# Altium PCB Main.PcbDoc
Units mm, origin at the board's own origin, x right, y up, seen from the top; angles counter-clockwise.
Board outline 98.81 x 90.42 mm, 4 copper layers (Top Layer, GND, PWR, Bottom Layer), stack 0.603 mm thick; 84 components, 51 nets, 262 pads, 1 vias.
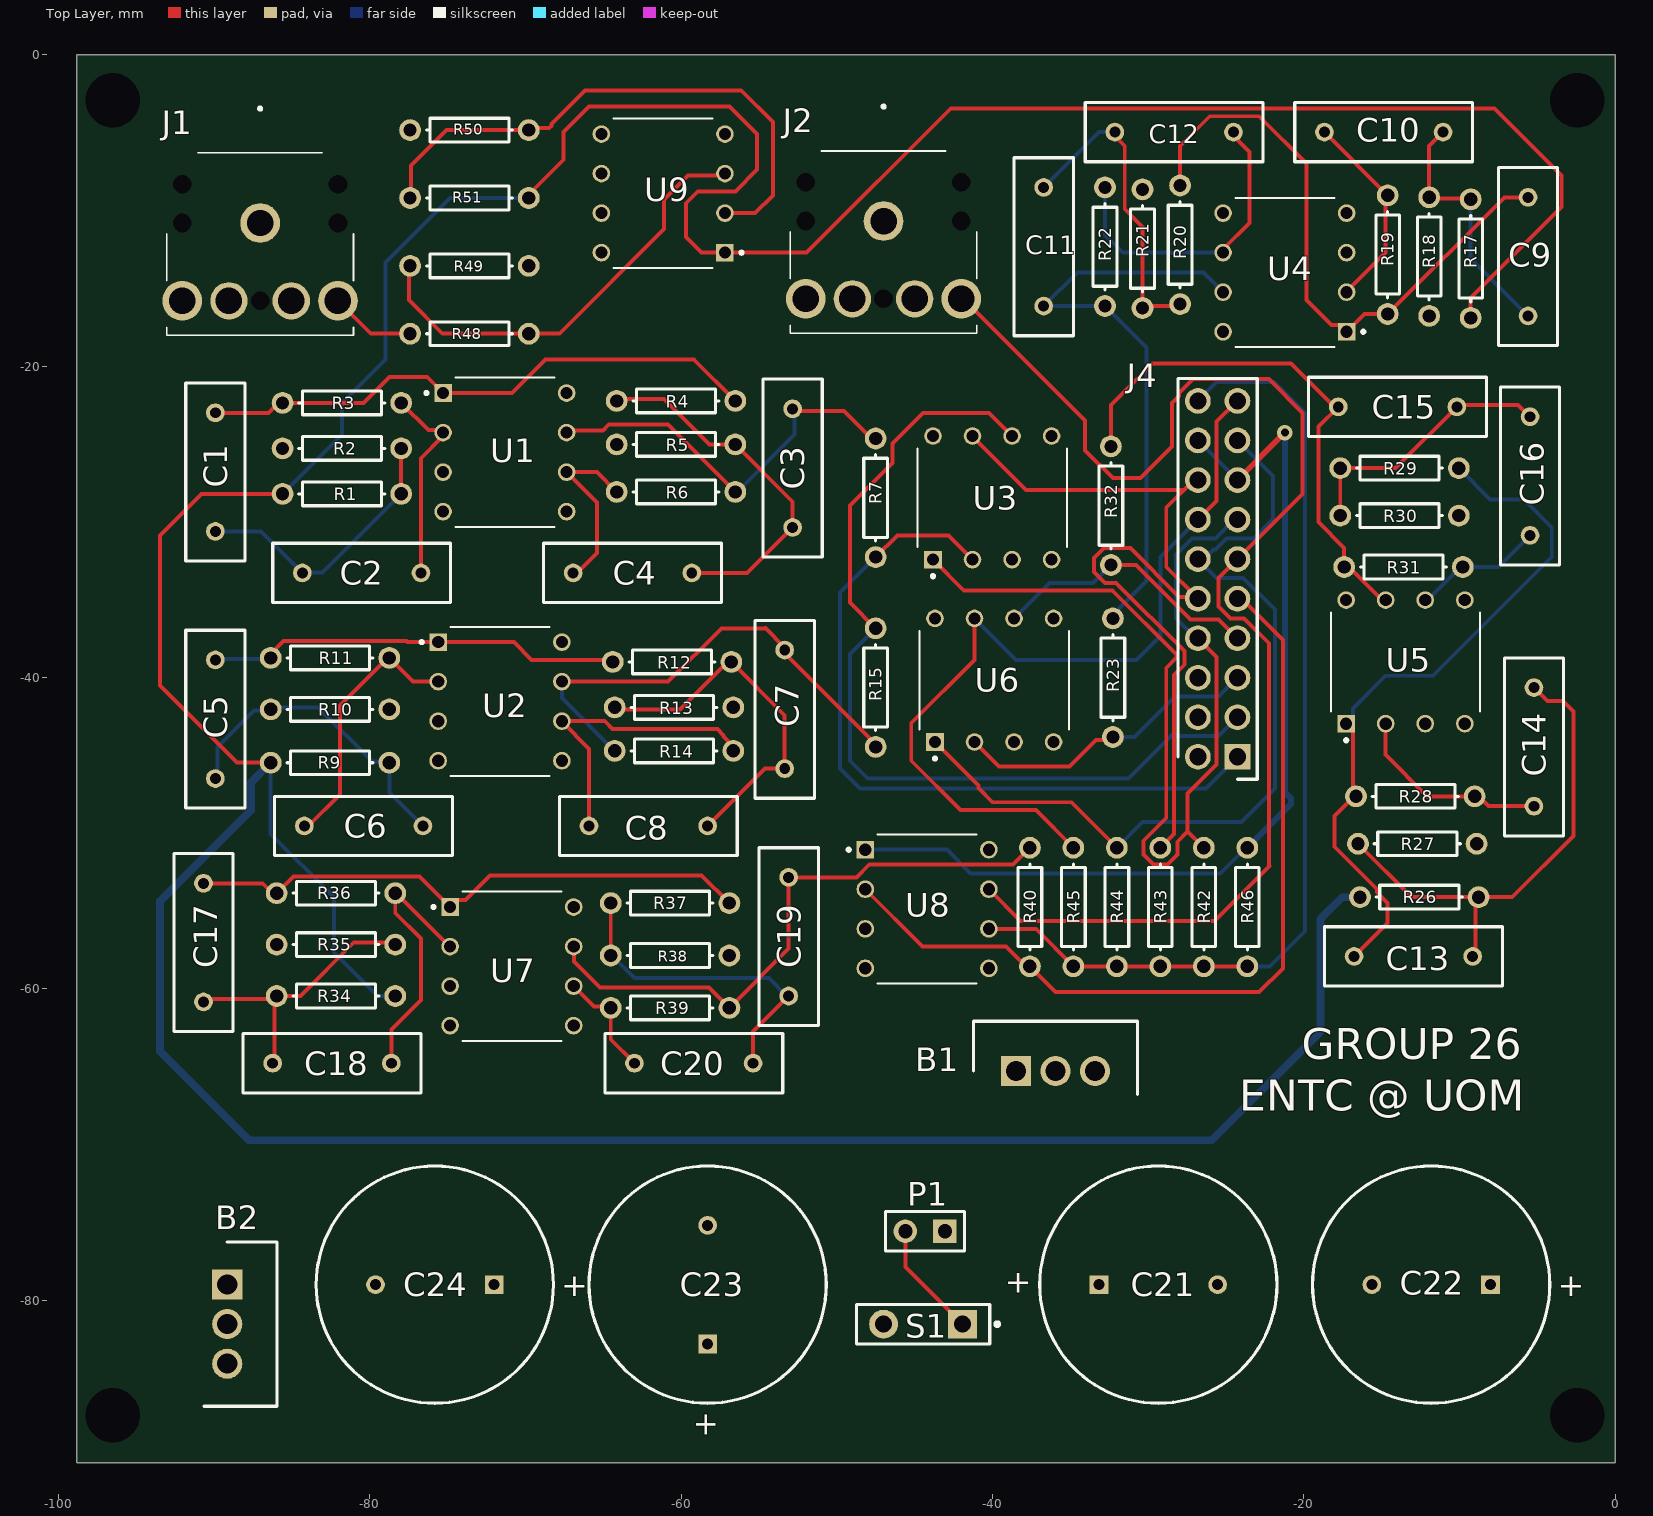
[diagram p0: Top Layer view]
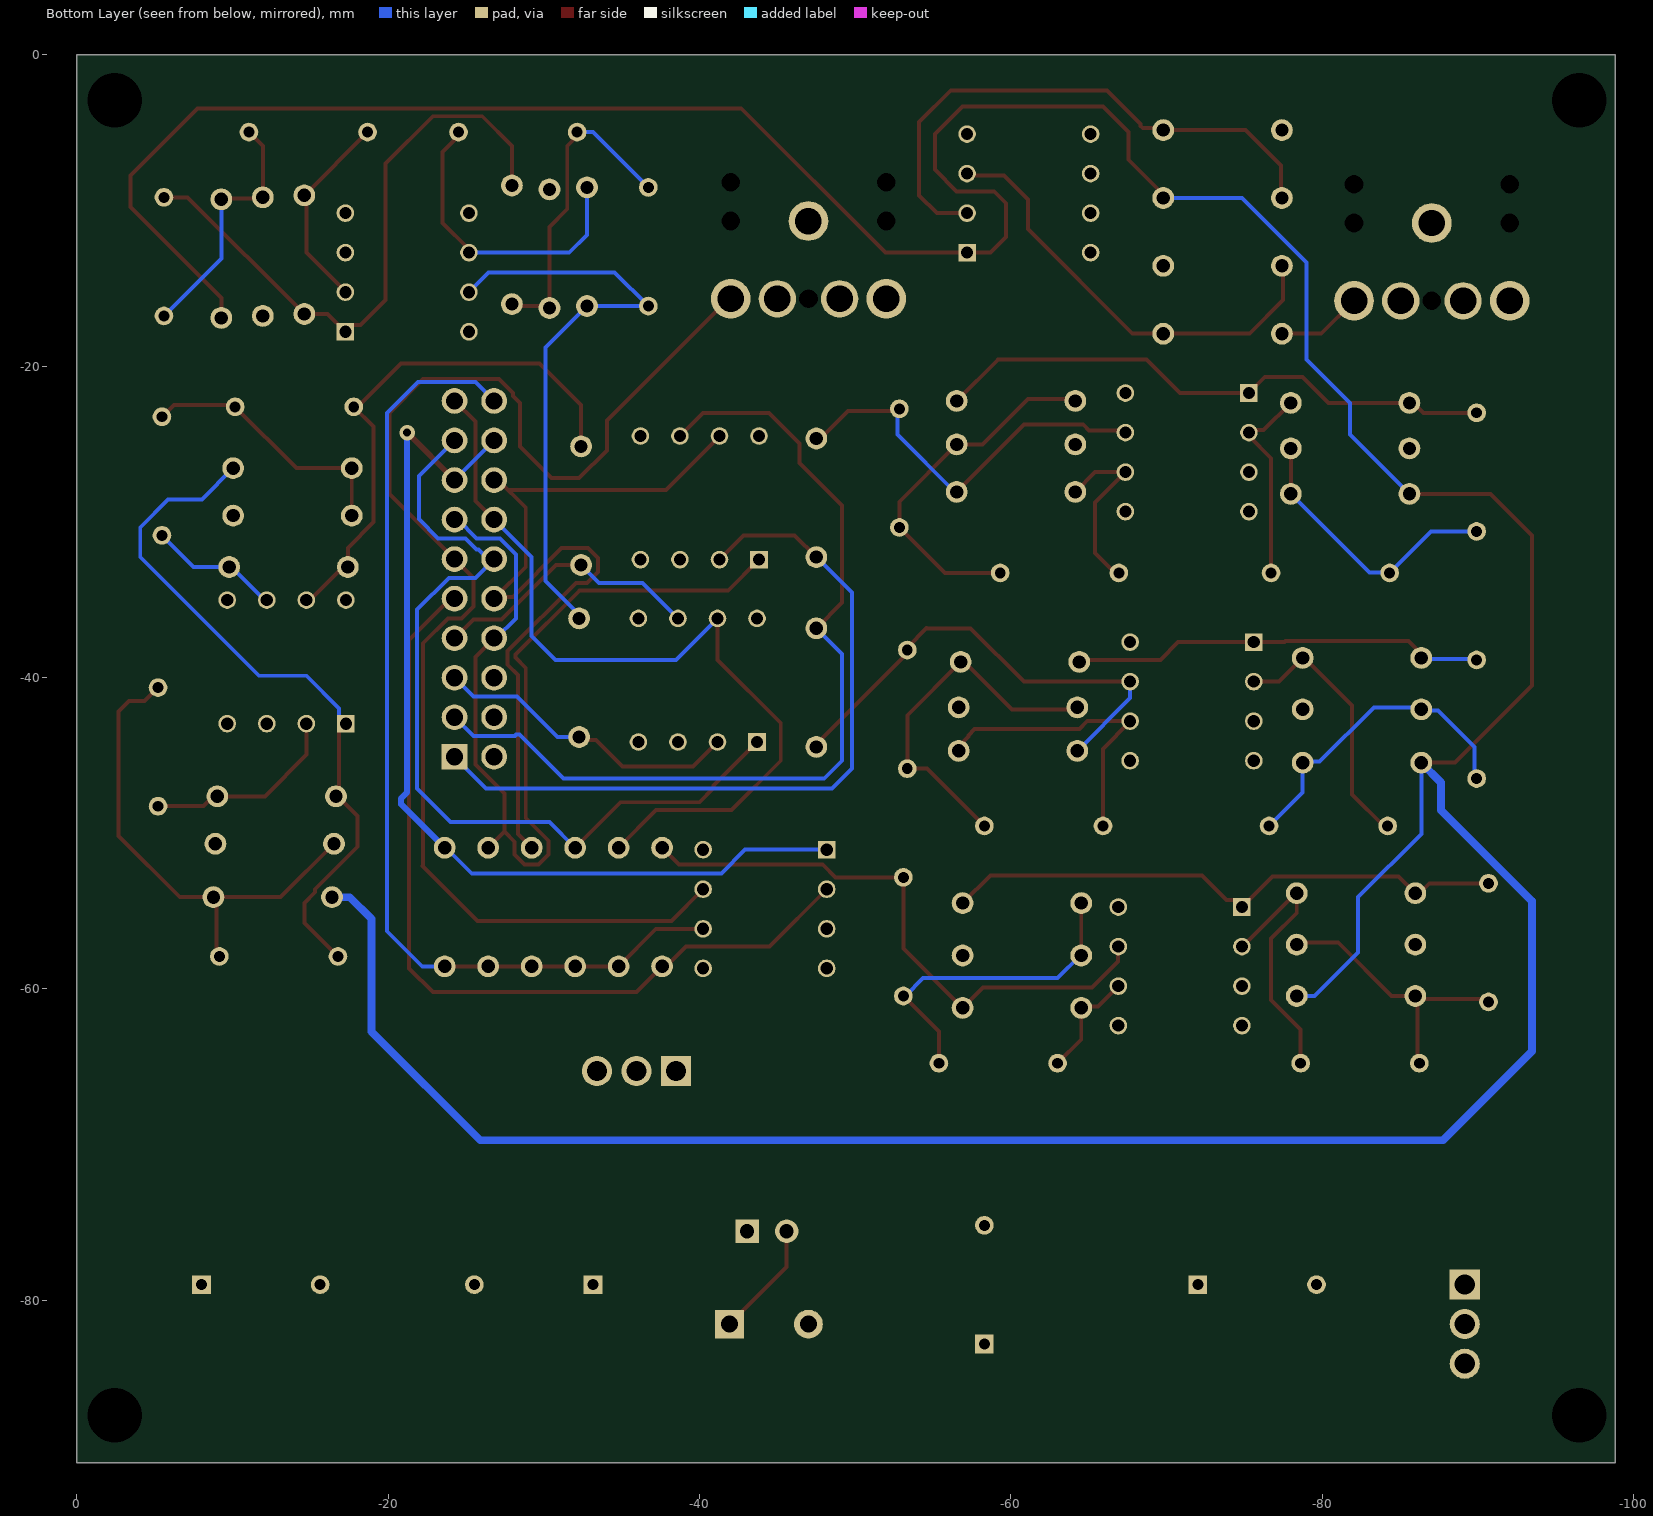
[diagram p1: Bottom Layer view, seen from below]
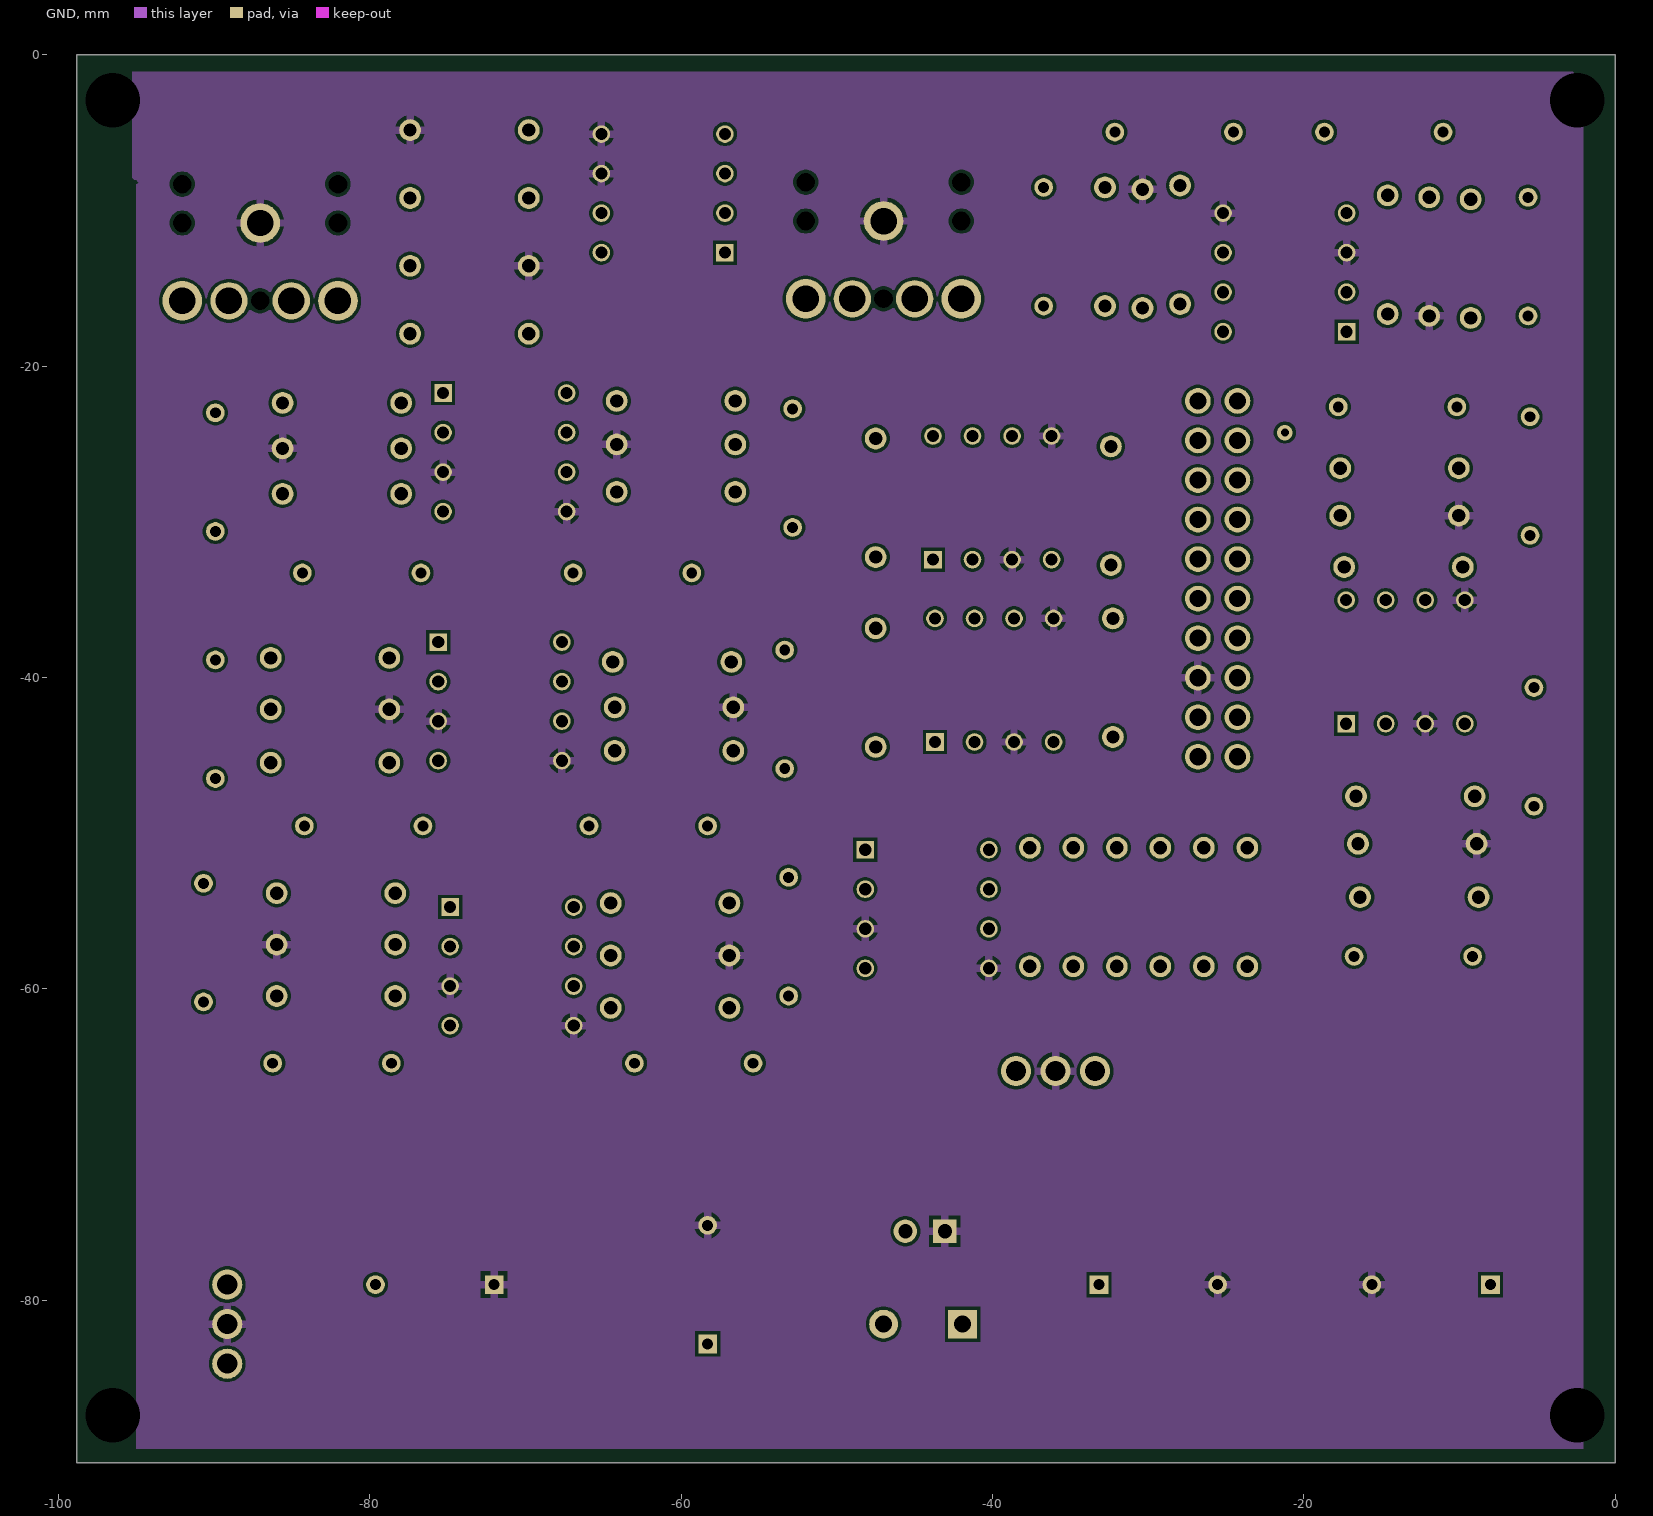
[diagram p2: GND]
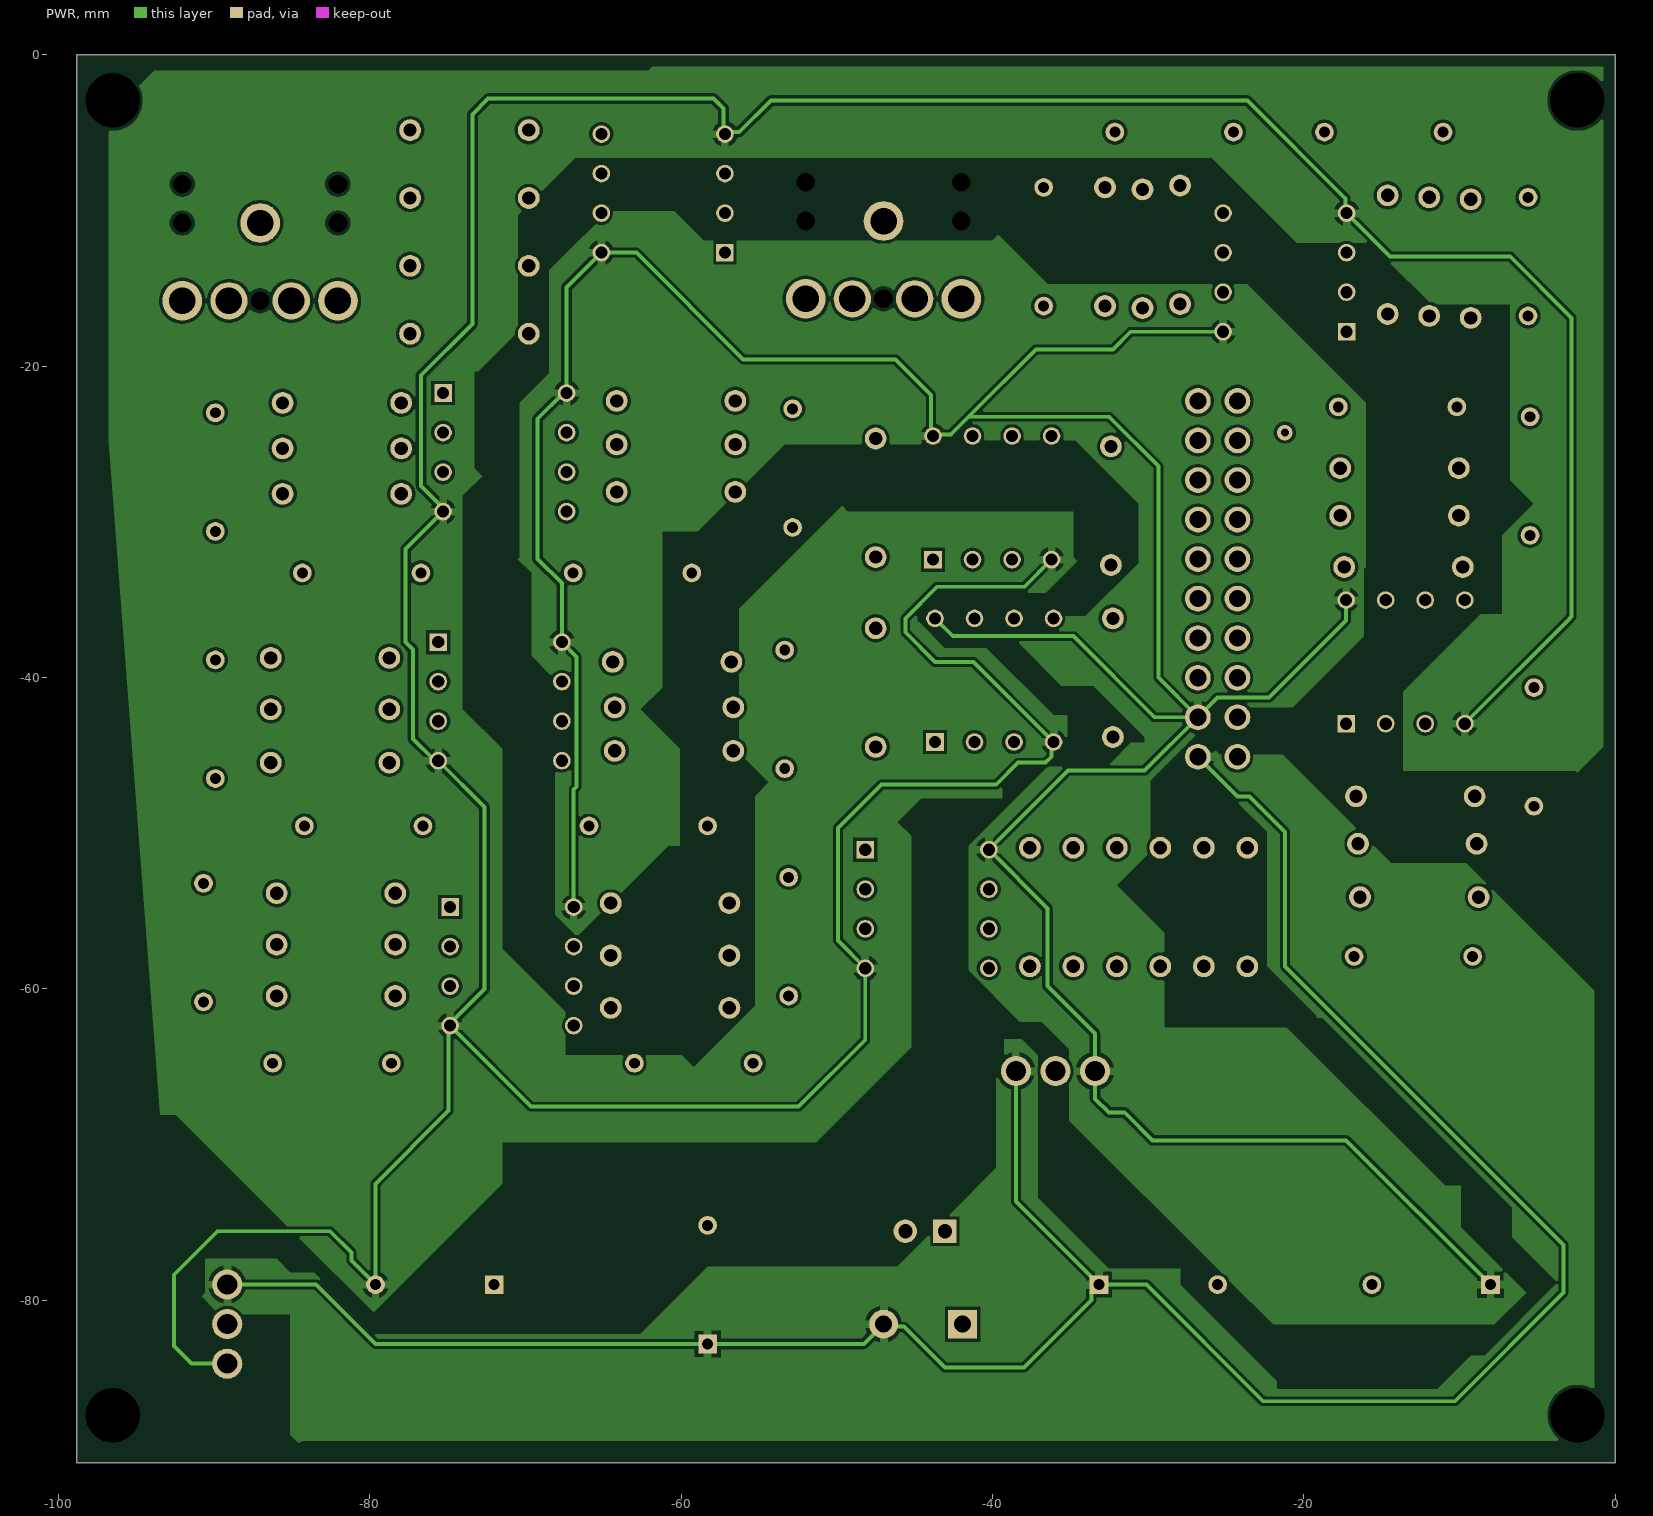
[diagram p3: PWR]

## Layer stack, top to bottom
Top Solder: solder mask 0.0102, Solder Resist, Dk 3.5
Top Layer: signal copper 0.0356
Dielectric 2: prepreg 0.0711, PP-006, Dk 4.1
GND: signal copper 0.035
Dielectric 1: dielectric 0.32, FR-4, Dk 4.8
PWR: signal copper 0.035
Dielectric 3: prepreg 0.0711, PP-006, Dk 4.1
Bottom Layer: signal copper 0.0356
Bottom Solder: solder mask 0.0102, Solder Resist, Dk 3.5

## Board outline
-98.806,-90.424 0,-90.424 0,0 -98.806,0

## Design rules (kind name [scope] priority, off if disabled: settings)
BoardOutlineClearance [All] p1: gap=0.2 ignorepadtopadclearanceinfootprint=FALSE except(0.4: Arc-SplitBarrior Arc-SplitContinuation Track-SplitBarrior Track-SplitContinuation SMDPad-SplitBarrior SMDPad-SplitContinuation THPad-SplitBarrior THPad-SplitContinuation Via-SplitBarrior Via-SplitContinuation Fill-SplitBarrior Fill-SplitContinuation Poly-SplitBarrior Poly-SplitContinuation Region-SplitBarrior Region-SplitContinuation Text-SplitBarrior Text-SplitContinuation)
Clearance "Clearance Bottom Layer" [OnLayer('Bottom Layer')] p1: gap=0.203 ignorepadtopadclearanceinfootprint=TRUE except(0.254: Arc-Text Track-Text SMDPad-Text THPad-Text Via-Text Fill-Text Poly-Text Region-Text Text-Text)
Clearance "Clearance Top Layer" [OnLayer('Top Layer')] p2: gap=0.203 ignorepadtopadclearanceinfootprint=TRUE except(0.254: Arc-Text Track-Text SMDPad-Text THPad-Text Via-Text Fill-Text Poly-Text Region-Text Text-Text)
Clearance [All] p3: gap=0.2 ignorepadtopadclearanceinfootprint=FALSE except(0.089: Arc-Arc Arc-Track Arc-SMDPad Track-Track Track-SMDPad SMDPad-SMDPad; 0.127: Arc-Via Track-Via SMDPad-Via THPad-Via Via-Via; 0.254: Arc-Text Track-Text SMDPad-Text THPad-Text Via-Text Fill-Text Poly-Text Region-Text Text-Text)
HoleSize [All] p1: absolutevalues=TRUE maxlimit=6.3 minlimit=0.2 maxpercent=80.000 minpercent=20.000
MinimumAnnularRing [All] p1: minimumring=0.076
MinimumSolderMaskSliver [All] p1: minsoldermaskwidth=0.1
PolygonConnect PolygonConnect_1 [All] p1: thpad.connectstyle=Relief thpad.reliefconductorwidth=0.508 thpad.reliefentries=4 thpad.polygonreliefangle="90 Angle" thpad.airgapwidth=0.254 smdpad.connectstyle=Relief smdpad.reliefconductorwidth=0.508 smdpad.reliefentries=4 smdpad.polygonreliefangle="90 Angle" smdpad.airgapwidth=0.254 via.connectstyle=Direct via.reliefconductorwidth=0.508 via.reliefentries=4 via.polygonreliefangle="90 Angle" via.airgapwidth=0.254
RoutingCorners [All] p1: cornerstyle=Round minsetback=2.54 maxsetback=2.54
RoutingVias [All] p1: holewidth=0.5 width=1 viastyle="Through Hole" minholewidth=0.2 minwidth=0.45 maxholewidth=1 maxwidth=2
SilkToSilkClearance [All] p1: silktosilkclearance=0.1
SilkToSolderMaskClearance [IsPad] p1: minsilkscreentomaskgap=0.1 clearancetoexposedcopper=TRUE
SolderMaskExpansion [All] p1: expansion=0.102 istentingtop=FALSE
Width [All] p1: maxlimit=2.54 minlimit=0.089 preferedwidth=0.381
25 further rules are at their usual default settings.

## Components (designator, comment, footprint, x,y, rotation, side; value= is the part's Value field where it differs from the comment)
B1 "LM7812CT" TO254P470X1028X1955-3P -38.481,-65.278 r0 top
B2 "LM7912CT_NOPB" TO254P470X1028X1955-3P -89.154,-78.994 r270 top
C1 "Cap" RAD-0.3 -89.916,-26.797 r90 top value=100nF
C2 "Cap" RAD-0.3 -80.518,-33.274 r0 top value=100nF
C3 "Cap" RAD-0.3 -52.832,-26.543 r90 top value=100nF
C4 "Cap" RAD-0.3 -63.119,-33.274 r180 top value=100nF
C5 "Cap" RAD-0.3 -89.916,-42.672 r90 top value=100nF
C6 "Cap" RAD-0.3 -80.391,-49.53 r180 top value=100nF
C7 "Cap" RAD-0.3 -53.34,-42.037 r90 top value=100nF
C8 "Cap" RAD-0.3 -62.103,-49.53 r180 top value=100nF
C9 "Cap" RAD-0.3 -5.588,-12.954 r90 top value=10nF
C10 "Cap" RAD-0.3 -14.859,-4.953 r180 top value=10nF
C11 "Cap" RAD-0.3 -36.703,-12.319 r270 top value=10nF
C12 "Cap" RAD-0.3 -28.321,-4.953 r0 top value=10nF
C13 "Cap" RAD-0.3 -12.954,-57.912 r180 top value=10nF
C14 "Cap" RAD-0.3 -5.207,-44.45 r270 top value=10nF
C15 "Cap" RAD-0.3 -13.97,-22.606 r180 top value=10nF
C16 "Cap" RAD-0.3 -5.461,-27.051 r270 top value=10nF
C17 "Cap" RAD-0.3 -90.678,-57.023 r90 top value=1nF
C18 "Cap" RAD-0.3 -82.423,-64.77 r0 top value=1nF
C19 "Cap" RAD-0.3 -53.086,-56.642 r90 top value=1nF
C20 "Cap" RAD-0.3 -59.182,-64.77 r180 top value=1nF
C21 "Cap Pol1" RB7.6-15 -29.337,-78.994 r180 top value=0.330pF
C22 "Cap Pol1" RB7.6-15 -11.811,-78.994 r0 top value=0.100pF
C23 "Cap Pol1" RB7.6-15 -58.293,-78.994 r270 top value=0.220pF
C24 "Cap Pol1" RB7.6-15 -75.819,-78.994 r0 top value=0.100pF
J1 "SJ1-3523N" SJ13523N -87.042,-6.295 r270 top
J2 "SJ1-3523N" SJ13523N -46.99,-6.168 r270 top
J4 "M20-9761042" HDRV20W64P254_2X10_2540X508X838P -24.257,-45.085 r90 top
P1 "Header 2" HDR1X2 -43.053,-75.565 r180 top
R1 "Res1" AXIAL-0.3 -81.788,-28.194 r0 top value=12K
R2 "Res1" AXIAL-0.3 -81.788,-25.273 r0 top value=68K
R3 "Res1" AXIAL-0.3 -81.788,-22.352 r180 top value=39K
R4 "Res1" AXIAL-0.3 -60.325,-22.225 r180 top value=3.3K
R5 "Res1" AXIAL-0.3 -60.325,-25.019 r0 top value=22K
R6 "Res1" AXIAL-0.3 -60.325,-28.067 r0 top value=10K
R7 "Res1" AXIAL-0.3 -47.498,-28.448 r90 top value=2.2K
R9 "Res1" AXIAL-0.3 -82.55,-45.466 r180 top value=3.3K
R10 "Res1" AXIAL-0.3 -82.55,-42.037 r180 top value=2K
R11 "Res1" AXIAL-0.3 -82.55,-38.735 r180 top value=10K
R12 "Res1" AXIAL-0.3 -60.579,-38.989 r180 top value=1.5K
R13 "Res1" AXIAL-0.3 -60.452,-41.91 r180 top value=910
R14 "Res1" AXIAL-0.3 -60.452,-44.704 r180 top value=4.7K
R15 "Res1" AXIAL-0.3 -47.498,-40.64 r90 top value=2.2K
R17 "Res1" AXIAL-0.3 -9.271,-13.081 r90 top value=9.1K
R18 "Res1" AXIAL-0.3 -11.938,-12.954 r90 top value=7.5K
R19 "Res1" AXIAL-0.3 -14.605,-12.827 r270 top value=27K
R20 "Res1" AXIAL-0.3 -27.94,-12.192 r270 top value=3.6K
R21 "Res1" AXIAL-0.3 -30.353,-12.446 r270 top value=3K
R22 "Res1" AXIAL-0.3 -32.766,-12.319 r270 top value=11K
R23 "Res1" AXIAL-0.3 -32.258,-40.005 r90 top value=2.2K
R26 "Res1" AXIAL-0.3 -12.573,-54.102 r0 top value=3.6K
R27 "Res1" AXIAL-0.3 -12.7,-50.673 r180 top value=1.2K
R28 "Res1" AXIAL-0.3 -12.827,-47.625 r180 top value=11K
R29 "Res1" AXIAL-0.3 -13.843,-26.543 r180 top value=1.8K
R30 "Res1" AXIAL-0.3 -13.843,-29.591 r180 top value=620
R31 "Res1" AXIAL-0.3 -13.589,-32.893 r180 top value=5.6K
R32 "Res1" AXIAL-0.3 -32.385,-28.956 r90 top value=2.2K
R34 "Res1" AXIAL-0.3 -82.169,-60.452 r180 top value=20K
R35 "Res1" AXIAL-0.3 -82.169,-57.15 r0 top value=3.6K
R36 "Res1" AXIAL-0.3 -82.169,-53.848 r180 top value=56K
R37 "Res1" AXIAL-0.3 -60.706,-54.483 r180 top value=12K
R38 "Res1" AXIAL-0.3 -60.706,-57.848 r180 top value=2.2K
R39 "Res1" AXIAL-0.3 -60.706,-61.214 r180 top value=36K
R40 "Res1" AXIAL-0.3 -37.592,-54.737 r90 top value=2.2K
R42 "Res1" AXIAL-0.3 -26.416,-54.737 r270 top value=5K
R43 "Res1" AXIAL-0.3 -29.21,-54.737 r270 top value=5K
R44 "Res1" AXIAL-0.3 -32.004,-54.737 r270 top value=5K
R45 "Res1" AXIAL-0.3 -34.798,-54.737 r270 top value=5K
R46 "Res1" AXIAL-0.3 -23.622,-54.737 r270 top value=5K
R48 "Res1" AXIAL-0.3 -73.594,-17.907 r0 top value=39K
R49 "Res1" AXIAL-0.3 -73.594,-13.547 r0 top value=68K
R50 "Res1" AXIAL-0.3 -73.594,-4.826 r180 top value=39K
R51 "Res1" AXIAL-0.3 -73.594,-9.186 r0 top value=68K
S1 "SW-SPST" SPST-2 -44.45,-81.534 r180 top
U1 "TL072CP" DIP794W45P254L959H508Q8 -71.319,-25.527 r0 top
U2 "TL072CP" DIP794W45P254L959H508Q8 -71.628,-41.529 r0 top
U3 "TL072CP" DIP794W45P254L959H508Q8 -40.005,-28.448 r90 top
U4 "NE5532P" DIP794W45P254L959H508Q8 -21.209,-13.97 r180 top
U5 "NE5532P" DIP794W45P254L959H508Q8 -13.462,-38.989 r90 top
U6 "NE5532P" DIP794W45P254L959H508Q8 -39.878,-40.165 r90 top
U7 "TL072CP" DIP794W45P254L959H508Q8 -70.866,-58.547 r0 top
U8 "NE5532P" DIP794W45P254L959H508Q8 -44.196,-54.864 r0 top
U9 "TL072CP" DIP794W45P254L959H508Q8 -61.149,-8.89 r180 top

## Footprints (in the part's own frame and the unit in brackets; to place one, negate y for a bottom-side part, rotate by r counter-clockwise, add the part's x,y. Pads: shape width x height; smd on the part's side, far side on the other; paste and mask are expansions set on the pad)
AXIAL-0.3 [mm] "Axial Device, Thru-Hole; 2 Leads; 0.3 in Pin Spacing"
  round 1.4 hole 0.85: 1(-3.81,0) 2(3.81,0)
  silkscreen extent -2.77,-0.76 2.77,0.76
DIP794W45P254L959H508Q8 [mm]
  rect 1.13x1.13 hole 0.78: 1(-3.97,3.81)
  round 1.13 hole 0.78: 2(-3.97,1.27) 3(-3.97,-1.27) 4(-3.97,-3.81) 5(3.97,-3.81) 6(3.97,-1.27) 7(3.97,1.27) 8(3.97,3.81)
  silkscreen extent -5.13,-4.79 3.17,4.79
HDR1X2 [mm] "Connector; Header; 2 Position"
  rect 1.5x1.5 hole 0.9: 1(0,0)
  round 1.5 hole 0.9: 2(2.54,0)
  silkscreen extent -1.27,-1.27 3.81,1.27
HDRV20W64P254_2X10_2540X508X838P [mm]
  rect 1.65x1.65 / inner round 1.65 / far side rect 1.65x1.65 hole 1.1: 1(0,0)
  round 1.65 hole 1.1: 2(0,2.54) 3(2.54,0) 4(2.54,2.54) 5(5.08,0) 6(5.08,2.54) 7(7.62,0) 8(7.62,2.54) 9(10.16,0) 10(10.16,2.54) 11(12.7,0) 12(12.7,2.54) 13(15.24,0) 14(15.24,2.54) 15(17.78,0) 16(17.78,2.54) 17(20.32,0) 18(20.32,2.54) 19(22.86,0) 20(22.86,2.54)
  silkscreen extent -1.45,-1.27 24.31,3.81, body extent -1.72,-1.54 24.58,4.09
RAD-0.3 [mm] "Radial Cap, Thru-Hole; 2 Leads; 0.3 in Pin Spacing"
  round 1.2 hole 0.7: 1(-3.81,0) 2(3.81,0)
  silkscreen extent -5.71,-1.91 5.71,1.91
RB7.6-15 [mm] "Polarized Capacitor (Radial); 2 Leads"
  rect 1.2x1.2 hole 0.7: 1(3.81,0)
  round 1.2 hole 0.7: 2(-3.81,0)
  silkscreen extent -7.62,-7.62 7.62,7.62
SJ13523N [mm]
  round 2.55 hole 1.7: 1(4.5,0) 2(9.5,-5) 3(9.5,5)
  round 2.4 hole 1.7: 10(9.5,-2) 11(9.5,2)
  round 0.6 hole 1.2 unplated: MH1(2,5) MH2(4.5,5) MH3(9.5,0) MH4(2,-5) MH5(4.5,-5)
  silkscreen extent -2.95,-6 11.7,6, body extent -10,-3.38 10,3.38, height 5.8
SPST-2 [mm] "Switch; 2 Leads"
  rect 1.85x1.85 hole 1.1: 1(-2.54,0)
  round 1.85 hole 1.1: 2(2.54,0)
  silkscreen extent -4.89,-1.27 4.28,1.27
TO254P470X1028X1955-3P [mm]
  rect 1.935x1.935 / inner round 1.935 / far side rect 1.935x1.935 hole 1.29: 1(0,0)
  round 1.935 hole 1.29: 2(2.54,0) 3(5.08,0)
  silkscreen extent -2.73,-1.5 7.81,3.2, body extent -10,-3.38 10,3.38, height 5.8

## Part data
B1: "TO220 voltage regulator,LM7812CT 12V 1A", Manufacturer_Name="Texas Instruments", Mouser Part Number=926-LM7812CT, Datasheet Link=http://www.ti.com/lit/ds/symlink/lm7800.pdf, Geometry.Height=4.7mm, Manufacturer_Part_Number=LM7812CT, Mouser Price/Stock=https://www.mouser.co.uk/ProductDetail/Texas-Instruments/LM7812CT?qs=QbsRYf82W3EQj7KGft8TFg%3D%3D
B2: "Texas Instruments LM7912CT/NOPB, Single Negative Voltage Regulator 1.5A -12 V, +/-4%, 3-Pin TO-220", Arrow Part Number=LM7912CT/NOPB, Manufacturer_Name="Texas Instruments", Mouser Part Number=926-LM7912CT/NOPB, Arrow Price/Stock=https://www.arrow.com/en/products/lm7912ctnopb/texas-instruments?region=nac, Datasheet Link=http://www.ti.com/lit/gpn/lm79, Geometry.Height=4.7mm, Manufacturer_Part_Number=LM7912CT/NOPB, Mouser Price/Stock=https://www.mouser.co.uk/ProductDetail/Texas-Instruments/LM7912CT-NOPB?qs=QbsRYf82W3GCP0%2FQjKEJfQ%3D%3D
C1 C2 C3 C4 C5 C6 C7 C8 C9 C10 C11 C12 C13 C14 C15 C16 C17 C18 C19 C20: "Capacitor", LatestRevisionDate=17-Jul-2002, LatestRevisionNote="Re-released for DXP Platform.", PackageDescription="Radial Cap, Thru-Hole; 2 Leads; 0.3 in Pin Spacing", PackageReference=RAD-0.3, Published=8-Jun-2000, Publisher="Altium Limited"
C21 C22 C23 C24: "Polarized Capacitor (Radial)", LatestRevisionDate=17-Jul-2002, LatestRevisionNote="Re-released for DXP Platform.", PackageDescription="Polarized Capacitor (Radial); 2 Leads", PackageReference=RB7.6-15, Published=8-Jun-2000, Publisher="Altium Limited"
J1 J2: "Phone Connectors 3.5 MM AUDIO JACK", Manufacturer_Name="CUI Devices", Mouser Part Number=490-SJ1-3523N, Arrow Part Number=SJ1-3523N, Arrow Price/Stock=https://www.arrow.com/en/products/sj1-3523n/cui-devices?region=nac, Datasheet Link=https://componentsearchengine.com/Datasheets/1/SJ1-3523N.pdf, Geometry.Height=5.5mm, Manufacturer_Part_Number=SJ1-3523N, Mouser Price/Stock=https://www.mouser.co.uk/ProductDetail/CUI-Devices/SJ1-3523N?qs=WyjlAZoYn50aNl0vAhb3Tg%3D%3D
J4: "Headers & Wire Housings 10+10 DIL VERTICAL PIN HEADER GOLD+TIN", Manufacturer_Name=Harwin, Mouser Part Number=855-M20-9761042, Datasheet Link=https://cdn.harwin.com/pdfs/M20-976.pdf, Geometry.Height=8.38mm, Manufacturer_Part_Number=M20-9761042, Mouser Price/Stock=https://www.mouser.co.uk/ProductDetail/Harwin/M20-9761042?qs=vF78I%252BjhbY%2Fp44UYNx369Q%3D%3D
P1: "Header, 2-Pin", LatestRevisionDate=17-Jul-2002, LatestRevisionNote="Re-released for DXP Platform.", Publisher="Altium Limited"
R1 R2 R3 R4 R5 R6 R7 R9 R10 R11 R12 R13 R14 R15 R17 R18 R19 R20 R21 R22 R23 R26 R27 R28 R29 R30 R31 R32 R34 R35 R36 R37 R38 R39 R40 R42 R43 R44 R45 R46 R48 R49 R50 R51: "Resistor", LatestRevisionDate=17-Jul-2002, LatestRevisionNote="Re-released for DXP Platform.", PackageDescription="Axial Device, Thru-Hole; 2 Leads; 0.3 in Pin Spacing", PackageReference=AXIAL-0.3, Published=8-Jun-2000, Publisher="Altium Limited"
S1: "Single-Pole, Single-Throw Switch", LatestRevisionDate=17-Jul-2002, LatestRevisionNote="Re-released for DXP Platform.", PackageDescription="Switch; 2 Leads", PackageReference=SPST-2, Published=24-Mar-1999, Publisher="Altium Limited"
U1 U2 U3 U7 U9: "Dual Low-Noise JFET-Input General-Purpose Operational Amplifier", Package="PDIP-8 Texas Instruments", Availability=Unavailable, DigiKey-Purchase-URL=https://snapeda.com/shop?store=DigiKey&id=2181721, MF="Texas Instruments", Mouser-Purchase-URL=https://snapeda.com/shop?store=Mouser&id=2181721, MP=TL072CP, Price=None, SnapEDA_Link=https://www.snapeda.com/parts/TL072CP/Texas%20Instruments/view-part/2181721/?ref=snap, Texas_Instruments-Purchase-URL=https://snapeda.com/shop?store=Texas+Instruments&id=2181721
U4 U5 U6 U8: "Dual Low-Noise High-Speed Audio Operational Amplifier 8-PDIP 0 to 70", Package="PDIP-8 Texas", Availability=Good, Check_prices=https://www.snapeda.com/parts/NE5532P/Texas%20Instruments/view-part/9039/?ref=eda, MF="Texas Instruments", MP=NE5532P, Price=None, Purchase-URL=https://pricing.snapeda.com/search/part/NE5532P/?ref=eda, SnapEDA_Link=https://www.snapeda.com/parts/NE5532P/Texas%20Instruments/view-part/9039/?ref=snap

## Free pads (board coordinates)
  round 1.524 hole 3.5: 2(-2.413,-2.921) 3(-96.52,-2.921) 4(-96.52,-87.376) 5(-2.413,-87.376)

## Via types
v1: diameter 1, hole 0.5, Top Layer to Bottom Layer, 1 vias

## Nets (pads, with @x,y where several pads share a name; then routed paths per layer and width w, separated by ;. In a path a pad name is that pad's centre, name@x,y a point inside that pad or via, vN(x,y) a via of type N, cw(c..) or ccw(c..) an arc to the next point about the centre after c; other vN are vias at no path point)
GND: B1.2 B2.2 C21.2 C22.2 C23.2 C24.1 J1.1 J2.1 J4.6 P1.1 pad.2 pad.3 pad.4 pad.5 R2.1 R5.1 R10.1 R13.1 R18.1 R21.1 R27.1 R30.1 R35.1 R38.1 R49.2 R50.2 U1.3 U1.5 U2.3 U2.5 U3.3 U3.5 U4.3 U4.5 U5.3 U5.5 U6.3 U6.5 U7.3 U7.5 U8.3 U8.5 U9.5 U9.6
Net_2: C1.1 C2.1 R1.2 R2.2 | length 18.1
  Top Layer w0.254: R1.2 R2.2
  Bottom Layer w0.254: C1.1 -86.995,-30.607 C2.1 -84.307,-33.253 -83.037,-33.253 R1.2
NetC1_2: C1.2 R3.2 R4.1 U1.1 | length 36.8
  Top Layer w0.254: C1.2 -86.492,-22.987 -85.857,-22.352 R3.2 -80.391,-22.352 -78.74,-20.701 -76.305,-20.701 U1.1 -70.866,-21.717 -68.707,-19.558 -59.182,-19.558 R4.1
NetC2_2: C2.2 R3.1 U1.2 | length 13.1
  Top Layer w0.254: R3.1 -76.235,-24.095 -75.451,-24.095 U1.2 -75.289,-24.489 -76.708,-25.908 C2.2
NetC3_1: C3.1 C4.1 R4.2 R5.2 | length 23.4
  Top Layer w0.254: R4.2 -64.008,-22.098 -61.087,-22.098 -58.166,-25.019 R5.2 -52.832,-28.702 C3.1 -55.753,-33.274 C4.1
NetC3_2: C3.2 R6.2 R7.2 U1.7 | length 26
  Top Layer w0.254: U1.7 -67.222,-24.13 -65.024,-24.13 -64.643,-23.749 -60.833,-23.749 R6.2 ; C3.2 -52.705,-22.86 -49.53,-22.86 -47.752,-24.638 R7.2
  Bottom Layer w0.254: R6.2 -56.388,-28.067 -52.705,-24.384 -52.705,-22.86 C3.2
NetC4_2: C4.2 R6.1 U1.6 | length 11.8
  Top Layer w0.254: C4.2 -66.675,-33.274 -65.405,-32.004 -65.405,-28.741 U1.6 -65.405,-26.797 R6.1
NetC5_1: C5.1 C6.1 R9.1 R10.2 | length 20.6
  Bottom Layer w0.254: C5.1 -89.789,-46.355 -89.789,-44.45 -87.441,-42.102 -86.425,-42.102 R10.2 -86.233,-41.91 -83.312,-41.91 -79.821,-45.401 -78.805,-45.401 R9.1 -78.74,-47.371 C6.1
NetC5_2: C5.2 R11.2 R12.2 U2.1 | length 26.7
  Top Layer w0.254: R11.2 -86.36,-38.481 -85.533,-37.654 -77.644,-37.654 -77.579,-37.719 U2.1 -70.739,-37.719 -69.596,-38.862 -64.516,-38.862 R12.2
  Bottom Layer w0.254: C5.2 -89.852,-38.798 -86.423,-38.798 R11.2
NetC6_2: C6.2 R11.1 U2.2 | length 17.1
  Top Layer w0.254: C6.2 -83.947,-49.53 -81.915,-47.498 -81.915,-41.783 -78.867,-38.735 R11.1 -77.216,-40.259 U2.2
NetC7_1: C7.1 C8.1 R12.1 R13.2 | length 23.6
  Top Layer w0.254: R13.2 -64.135,-42.037 -60.071,-42.037 -57.023,-38.989 R12.1 -53.34,-42.418 C7.1 -54.61,-45.847 C8.1
NetC7_2: C7.2 R14.2 R15.1 U2.7 | length 30.9
  Top Layer w0.254: U2.7 -60.833,-40.259 -57.404,-36.83 -54.61,-36.83 -54.588,-36.808 -53.34,-38.056 C7.2 -53.34,-38.417 -47.498,-44.259 R15.1
  Bottom Layer w0.254: U2.7 -67.658,-41.308 R14.2
NetC8_2: C8.2 R14.1 U2.6 | length 19.5
  Top Layer w0.254: C8.2 -65.913,-44.577 -67.658,-42.832 U2.6 -64.902,-42.799 -64.394,-43.307 -57.658,-43.307 -57.26,-43.705 -57.26,-43.793 -56.642,-44.411 R14.1
NetC9_1: C9.1 C10.1 R17.2 R18.2 | length 16.3
  Top Layer w0.254: C10.1 -11.938,-5.842 R18.2 -11.874,-9.207 -9.335,-9.207 R17.2
  Bottom Layer w0.254: R17.2 -9.271,-13.081 C9.1
NetC9_2: C9.2 R19.2 R20.1 U4.1 | length 40.1
  Top Layer w0.254: R20.1 -27.94,-5.842 -26.035,-3.937 -22.86,-3.937 -19.812,-6.985 -19.812,-15.748 -18.218,-17.342 -17.677,-17.342 U4.1 -16.096,-16.637 R19.2 -7.112,-9.144 C9.2
NetC10_2: C10.2 R19.1 U4.2 | length 13.1
  Top Layer w0.254: C10.2 R19.1 -14.732,-9.144 -14.732,-12.7 -17.239,-15.207 U4.2
NetC11_1: C11.1 C12.1 R20.2 R21.2 | length 20.9
  Top Layer w0.254: C12.1@-32.385,-5.334 C12.1@-32.385,-5.08 ; C12.1 -32.131,-5.207 -31.496,-5.842 -31.496,-9.906 -30.353,-11.049 -30.353,-16.129 R21.2 -30.226,-16.129 -28.067,-16.129 R20.2
  Bottom Layer w0.254: C11.1 -33.147,-4.953 C12.1
NetC11_2: C11.2 R22.2 R23.2 U4.7 | length 38.9
  Bottom Layer w0.254: R23.2 -32.258,-35.941 -30.099,-33.782 -30.099,-18.796 R22.2 C11.2 -34.544,-13.97 -26.449,-13.97 U4.7
NetC12_2: C12.2 R22.1 U4.6 | length 20.2
  Top Layer w0.254: U4.6 -25.179,-12.479 -23.495,-10.795 -23.495,-6.223 -24.511,-5.207 C12.2 ; C12.2@-24.765,-5.334 C12.2@-24.765,-5.08
  Bottom Layer w0.254: R22.1 -32.766,-11.557 -31.623,-12.7 U4.6
NetC13_1: C13.1 C14.1 R26.2 R27.2 | length 32
  Top Layer w0.254: R27.2 -13.081,-54.102 R26.2 ; C13.1 -8.963,-57.731 -8.963,-54.302 R26.2 ; C14.1 -4.344,-41.503 -3.349,-41.503 -2.667,-42.186 -2.667,-50.165 -6.604,-54.102 R26.2
NetC13_2: C13.2 R28.2 R29.1 U5.1 | length 45.6
  Top Layer w0.254: U5.1 -16.834,-43.397 -16.834,-47.428 R28.2 -16.764,-47.625 -18.034,-48.895 -18.034,-50.863 -15.302,-53.596 -15.302,-53.786 -14.605,-54.483 -14.605,-55.753 C13.2
  Bottom Layer w0.254: U5.1 -16.834,-42.521 -16.834,-41.98 -14.732,-39.878 -11.684,-39.878 -4.064,-32.258 -4.064,-30.353 -5.859,-28.558 -8.018,-28.558 R29.1
NetC14_2: C14.2 R28.1 U5.2 | length 12.9
  Top Layer w0.254: U5.2 -14.732,-44.704 -14.754,-44.726 -14.754,-44.936 -12.065,-47.625 R28.1 -8.758,-47.625 -8.123,-48.26 C14.2
NetC15_1: C15.1 C16.1 R29.2 R30.2 | length 17.4
  Top Layer w0.254: R30.2 R29.2 -14.097,-26.543 C15.1 -10.033,-22.479 -6.223,-22.479 C16.1
  Bottom Layer w0.254: C15.1 C15.1@-10.043,-22.606
NetC15_2: C15.2 R31.2 R32.2 U5.7 | length 34.6
  Top Layer w0.254: R32.2 -32.385,-22.479 -29.718,-19.812 -20.828,-19.812 -18.034,-22.606 C15.2 -19.05,-23.876 -19.05,-30.007 -17.399,-31.658 R31.2 -17.095,-32.893 -14.969,-35.019 U5.7
NetC16_2: C16.2 R31.1 U5.6 | length 8.5
  Bottom Layer w0.254: U5.6 -12.049,-35.019 -9.922,-32.893 R31.1 -7.493,-32.893 C16.2
NetC17_1: C17.1 C18.1 R34.2 R35.2 | length 18.2
  Top Layer w0.254: C17.1 -90.497,-60.652 -86.179,-60.652 R34.2@-86.106,-60.579 ; C18.1 -86.106,-64.643 R34.2@-86.106,-60.579 ; R35.2 -78.486,-57.023 -81.026,-57.023 -84.455,-60.452 R34.2 R34.2@-86.106,-60.579
NetC17_2: C17.2 R36.2 R37.1 U7.1 | length 36.9
  Top Layer w0.254: C17.2 -86.873,-53.213 -86.238,-53.848 R36.2 -84.898,-52.767 -76.806,-52.767 U7.1 -74.398,-54.299 -73.857,-54.299 -72.263,-52.705 -58.674,-52.705 R37.1
NetC18_2: C18.2 R36.1 U7.2 | length 17.3
  Top Layer w0.254: C18.2 -78.613,-62.611 -76.708,-60.706 -76.708,-56.769 -78.359,-55.118 R36.1 -78.312,-53.848 -74.883,-57.277 U7.2
NetC19_1: C19.1 C20.1 R37.2 R38.2 | length 21.1
  Top Layer w0.254: R38.2 R37.2 ; C20.1 -55.372,-62.738 C19.1
  Bottom Layer w0.254: R38.2 -64.453,-57.848 -62.992,-59.309 -54.356,-59.309 -53.213,-60.452 C19.1
NetC19_2: C19.2 R39.1 R40.2 U7.7 | length 38.4
  Top Layer w0.254: U7.7 -66.872,-57.301 -66.872,-58.223 -65.197,-59.898 -58.212,-59.898 R39.1 -53.086,-57.404 C19.2 -48.742,-52.832 -47.91,-52 -38.665,-52 R40.2
NetC20_2: C20.2 R39.2 U7.6 | length 7.1
  Top Layer w0.254: U7.6 -65.597,-61.116 -64.614,-61.116 R39.2 -64.516,-63.246 C20.2
NetJ1_3: J1.3 R48.1 | length 5.5
  Top Layer w0.254: J1.3 -79.93,-17.907 R48.1
NetP1_2: P1.2 S1.1 | length 7.5
  Top Layer w0.254: P1.2 -45.593,-77.851 S1.1
NetR1_1: R1.1 R9.2 R17.1 R26.1 R34.1 R51.2 U9.1 | length 290.1
  Top Layer w0.254: R9.2 -88.519,-45.466 -93.472,-40.513 -93.472,-30.861 -90.805,-28.194 R1.1 ; R51.2@-69.784,-9.332 R51.2 -69.784,-8.951 -67.564,-6.731 -67.564,-4.953 -65.913,-3.302 -56.896,-3.302 -55.118,-5.08 -55.118,-7.366 -56.515,-8.763 -58.928,-8.763 -59.69,-9.525 -59.69,-11.684 -58.674,-12.7 U9.1 -51.943,-12.7 -42.672,-3.429 -7.747,-3.429 -3.429,-7.747 -3.429,-9.779 -9.271,-15.621 R17.1 R17.1@-9.271,-17.145
  Bottom Layer w0.254: R9.2 -86.36,-50.038 -82.296,-54.102 -82.296,-57.658 -79.502,-60.452 R34.1 ; R1.1 -81.788,-24.384 -81.788,-22.352 -78.994,-19.558 -78.994,-13.335 -74.845,-9.186 R51.2
  Bottom Layer w0.5: R9.2 -87.63,-46.736 -87.63,-48.514 -93.472,-54.356 -93.472,-64.008 -87.757,-69.723 -25.908,-69.723 -18.923,-62.738 -18.923,-55.499 -17.526,-54.102 R26.1
NetR48_2: R48.2 R49.1 U9.3 | length 28.8
  Top Layer w0.254: R49.1 -77.47,-13.613 -77.47,-15.748 -75.311,-17.907 R48.2 -67.818,-17.907 -61.087,-11.176 -61.087,-9.271 -59.563,-7.747 -57.306,-7.747 U9.3
NetR50_1: R50.1 R51.1 U9.2 | length 36.5
  Top Layer w0.254: R51.1 -77.343,-9.126 -77.343,-7.112 -75.057,-4.826 R50.1 -69.657,-4.699 -68.475,-4.699 -68.326,-4.55 -68.326,-4.445 -66.167,-2.286 -56.134,-2.286 -54.102,-4.318 -54.102,-9.017 -55.245,-10.16 U9.2
out1: J4.8 J4.13 R42.1 U3.1 | length 62.4
  Top Layer w0.254: U3.1 -41.816,-34.417 -32.269,-34.417 -28.178,-38.508 -28.178,-38.719 -28.829,-39.37 -28.829,-49.017 -30.291,-50.479 -30.291,-51.375 -29.658,-52.008 -28.762,-52.008 -28.108,-51.354 -28.108,-50.543 -27.454,-49.889 ; J4.8 -25.591,-38.671 -25.591,-45.585 -27.454,-47.447 -27.454,-49.889 ; R42.1 -27.454,-49.889
  Bottom Layer w0.254: J4.8 -26.924,-37.465 -28.194,-36.195 -28.194,-32.076 -27.169,-31.051 -25.673,-31.051 -24.467,-29.845 J4.13
out2: J4.10 J4.16 R43.1 U3.7 | length 54.6
  Top Layer w0.254: U3.7 -41.275,-24.511 -37.846,-27.94 -27.81,-27.94 ; R43.1 -28.321,-50.038 -28.321,-39.823 -27.67,-39.172 -27.67,-38.298 -32.059,-33.909 -32.771,-33.909 -33.466,-33.214 -33.466,-32.318 -32.833,-31.685 -31.14,-31.685 -28.003,-34.822 J4.10@-26.9,-34.822 ; J4.10 J4.10@-26.9,-34.822 ; J4.16 -27.051,-27.305 -28.829,-29.083 -28.829,-32.893 J4.10@-26.9,-34.822
out3: J4.12 J4.17 R44.1 U6.1 | length 56
  Top Layer w0.254: U6.1 -40.894,-46.929 -40.894,-47.095 -39.983,-48.006 -34.925,-48.006 R44.1
  Bottom Layer w0.254: R44.1 -30.353,-49.276 -24.003,-49.276 -21.844,-47.117 -21.844,-35.632 -23.885,-33.591 -25.591,-33.591 J4.12 -26.419,-32.385 -25.793,-31.759 -25.663,-31.759 -24.955,-31.051 -23.199,-31.051 -21.971,-29.823 -21.971,-27.051 J4.17
out4: J4.14 J4.19 R45.1 U6.7 | length 54.5
  Top Layer w0.254: U6.7 -41.148,-38.862 -45.212,-42.926 -45.212,-45.339 -42.037,-48.514 -37.211,-48.514 R45.1 ; J4.14 -25.591,-28.639 -25.591,-23.558 J4.19 ; J4.19@-24.257,-22.352 J4.19
  Bottom Layer w0.254: U6.7 -38.481,-38.862 -30.734,-38.862 -29.21,-37.338 -29.21,-32.258 J4.14
out5: J4.15 J4.18 R46.1 U8.1 | length 62.3
  Top Layer w0.381: J4.15 v1(-21.209,-24.257) ; R46.1 -23.495,-50.8 R46.1@-23.114,-50.8
  Bottom Layer w0.254: U8.1 -42.926,-51.054 -41.402,-52.578 -25.4,-52.578 -25.378,-52.6 -23.705,-50.927 R46.1 ; J4.18 J4.15
  Bottom Layer w0.381: R46.1 -20.828,-48.133 -20.828,-47.752 -21.209,-47.371 v1(-21.209,-24.257)
Raw_V_POS: B1.1 B2.1 C21.1 C23.1 J4.2 S1.2 | length 158.1
  PWR w0.254: B2.1 -83.439,-78.994 -79.629,-82.804 C23.1 -48.26,-82.804 S1.2 -46.827,-81.697 -45.684,-81.697 -43.053,-84.328 -37.973,-84.328 -33.62,-79.975 -33.62,-79.467 C21.1 ; B1.1 -38.481,-73.66 C21.1 ; J4.2 -24.25,-47.632 -23.488,-47.632 -21.209,-49.911 -21.209,-58.547 -3.302,-76.454 -3.302,-79.502 -10.287,-86.487 -22.606,-86.487 -30.099,-78.994 C21.1
V_NEG: B2.3 C24.2 U1.4 U2.4 U3.4 U4.4 U5.4 U6.4 U7.4 U8.4 U9.4 | length 302.6
  PWR w0.254: B2.3 -91.44,-84.074 -92.583,-82.931 -92.583,-78.359 -89.789,-75.565 -82.55,-75.565 -81.18,-76.935 -81.18,-77.443 C24.2 -79.629,-72.517 -74.93,-67.818 -74.93,-62.451 U7.4 ; U3.4@-36.214,-32.207 U3.4@-36.068,-32.06 ; U3.4 -37.94,-34.163 -43.561,-34.163 -45.593,-36.195 -45.593,-37.084 -43.688,-38.989 -41.214,-38.989 U6.4 -36.213,-44.28 -36.213,-45.081 -36.598,-45.466 -38.354,-45.466 -39.751,-46.863 -47.117,-46.863 -49.911,-49.657 -49.911,-56.896 -48.166,-58.641 U8.4 -48.166,-63.279 -52.451,-67.564 -69.629,-67.564 U7.4 ; U5.4 -2.921,-36.228 -2.921,-36.195 -2.794,-36.068 -2.794,-16.891 -6.731,-12.954 -14.445,-12.954 U4.4 -17.329,-10.07 -17.329,-9.214 -23.622,-2.921 -54.229,-2.921 -56.261,-4.953 -57.052,-4.953 U9.4 -57.277,-4.982 -57.277,-3.429 -57.912,-2.794 -72.39,-2.794 -73.406,-3.81 -73.406,-17.272 -76.708,-20.574 -76.708,-27.686 -75.289,-29.105 U1.4 -77.689,-31.737 -77.689,-37.722 -77.216,-38.195 -77.216,-43.942 -75.819,-45.339 U2.4 -72.626,-48.311 -72.626,-60.009 -74.836,-62.219 U7.4
V_POS: B1.3 C22.1 J4.4 U1.8 U2.8 U3.8 U4.8 U5.8 U6.8 U7.8 U8.8 U9.8 | length 223.9
  Top Layer w0.254: J4.4 J4.4@-26.67,-42.545
  PWR w0.254: U7.8 -66.896,-47.193 -66.712,-47.009 -66.712,-38.665 U2.8 -67.658,-33.932 -69.215,-32.375 -69.215,-23.368 -67.564,-21.717 U1.8 -67.349,-14.93 U9.8 -62.865,-12.7 -56.007,-19.558 -46.228,-19.558 -43.942,-21.844 -43.942,-24.351 U3.8 -43.721,-24.384 -42.672,-24.384 -41.529,-23.241 ; U6.8 -42.545,-37.338 -34.798,-37.338 -29.591,-42.545 J4.4 ; U4.8 -31.115,-17.78 -32.258,-18.923 -37.211,-18.923 -41.529,-23.241 ; U5.8 -17.272,-36.322 -22.225,-41.275 -25.527,-41.275 J4.4 ; C22.1 -17.272,-69.723 -29.718,-69.723 -31.496,-67.945 -32.512,-67.945 -33.401,-67.056 B1.3 -33.401,-62.865 -36.449,-59.817 -36.449,-54.831 U8.8 -35.146,-45.974 -30.226,-45.974 J4.4 ; -41.529,-23.241 -32.512,-23.241 -29.337,-26.416 -29.337,-40.005 J4.4
VarResN6: J4.20 R42.2 R43.2 R44.2 R45.2 R46.2 U8.6 | length 63.7
  Top Layer w0.254: U8.6 -37.211,-56.134 R45.2 R44.2 R43.2 R42.2 R46.2
  Bottom Layer w0.254: J4.20 -25.591,-21.019 -21.907,-21.019 -19.926,-23 -19.926,-56.292 -22.181,-58.547 R46.2
VarResP1: J4.1 R7.1 U3.2 | length 48.9
  Top Layer w0.254: R7.1 -46.101,-30.861 -42.832,-30.861 U3.2
  Bottom Layer w0.254: R7.1 -49.784,-34.544 -49.784,-45.847 -48.514,-47.117 -26.289,-47.117 J4.1
VarResP2: J4.3 R15.2 U3.6 | length 59.1
  Top Layer w0.254: R15.2 -49.149,-35.179 -49.149,-28.956 -46.417,-26.224 -46.417,-24.954 -44.45,-22.987 -40.226,-22.987 U3.6
  Bottom Layer w0.254: R15.2 -49.149,-38.481 -49.149,-45.339 -48.006,-46.482 -31.242,-46.482 -28.426,-43.666 -28.216,-43.666 -28.131,-43.751 -25.463,-43.751 J4.3
VarResP3: J4.5 R23.1 U6.2 | length 19.9
  Top Layer w0.254: U6.2 -39.563,-45.72 -35.052,-45.72 -33.339,-44.007 -32.45,-44.007 R23.1
  Bottom Layer w0.254: R23.1 -30.861,-43.815 -28.257,-41.211 -25.463,-41.211 J4.5
VarResP4: J4.7 R32.1 U6.6 | length 17.7
  Top Layer w0.254: R32.1 -30.778,-32.766 -27.285,-36.259 -25.463,-36.259 J4.7
  Bottom Layer w0.254: U6.6 -36.322,-33.909 -33.528,-33.909 R32.1
VarResP5: J4.9 R40.1 U8.2 | length 55.5
  Top Layer w0.254: U8.2 -44.483,-57.277 -39.116,-57.277 -37.846,-58.547 R40.1 -35.941,-60.198 -22.86,-60.198 -21.336,-58.674 -21.336,-37.592 -24.003,-34.925 -24.003,-34.798 -24.13,-34.925 J4.9
VarResP6: J2.3 J4.11 U8.7 | length 86.6
  Top Layer w0.254: J2.3 -41.863,-15.668 -34.036,-23.495 -34.036,-25.4 -32.258,-27.178 -30.48,-27.178 -28.448,-25.146 -28.448,-22.352 -28.003,-21.907 -28.003,-21.725 -27.106,-20.828 -22.225,-20.828 -20.066,-22.987 -20.066,-28.194 J4.11 -25.463,-33.591 -25.463,-35.425 -24.693,-36.195 -23.821,-36.195 -22.225,-37.791 -22.225,-52.07 -22.203,-52.092 -25.737,-55.626 -38.194,-55.626 U8.7
pads on no net: J1.2 J1.10 J1.11 J1.MH1 J1.MH2 J1.MH3 J1.MH4 J1.MH5 J2.2 J2.10 J2.11 J2.MH1 J2.MH2 J2.MH3 J2.MH4 J2.MH5 U9.7

## Polygon pours and split planes (outlines as drawn)
GND on GND "GND_L02_P000" (solid, pour order 0): -94.615,-8.509 -95.25,-7.874 -95.25,-1.016 -2.794,-1.016 -1.651,-2.159 -2.032,-2.54 -2.032,-89.535 -94.996,-89.535 -94.996,-8.001
Raw_V_POS on PWR "RAW_V_POS_L03_P004" (solid, pour order 4): -84.582,-89.154 -85.09,-88.646 -85.09,-80.899 -89.662,-80.899 -90.805,-79.756 -90.551,-79.502 -90.551,-77.343 -85.979,-77.343 -85.09,-78.232 -83.566,-78.232 -79.629,-82.169 -62.61,-82.169 -58.292,-77.851 -46.101,-77.851 -39.751,-71.501 -39.751,-64.897 -39.243,-64.389 -39.243,-63.246 -38.1,-63.246 -37.084,-64.262 -37.084,-73.406 -32.512,-77.978 -27.94,-77.978 -27.94,-78.994 -21.717,-85.217 -21.717,-85.725 -11.43,-85.725 -9.271,-83.566 -8.382,-83.566 -3.683,-78.867 -6.604,-75.946 -6.604,-74.041 -18.796,-61.849 -19.177,-61.849 -19.177,-61.722 -22.352,-58.547 -22.352,-49.911 -25.908,-46.355 -27.051,-46.355 -27.559,-45.847 -27.432,-45.72 -27.432,-44.704 -26.67,-44.704 -26.162,-44.196 -25.4,-44.958 -21.336,-44.958 -14.371,-51.923 -9.553,-51.923 -1.35,-60.126 -1.35,-88.693 -1.016,-89.027 -84.201,-89.027
V_POS on PWR "V_POS_L03_P003" (solid, pour order 3): -35.052,-63.881 -35.052,-68.453 -21.971,-81.534 -7.747,-81.534 -5.715,-79.502 -9.906,-75.311 -9.906,-72.644 -10.922,-72.644 -21.082,-62.484 -28.956,-62.484 -28.956,-56.388 -32.004,-53.34 -29.845,-51.181 -29.845,-46.609 -25.146,-41.91 -20.701,-41.91 -16.129,-37.338 -16.129,-33.02 -16.002,-32.893 -16.002,-22.352 -23.622,-14.732 -36.449,-14.732 -39.624,-11.557 -40.005,-11.938 -58.547,-11.938 -60.452,-10.033 -64.643,-10.033 -68.453,-13.843 -68.453,-20.447 -70.358,-22.352 -70.358,-32.258 -70.485,-32.385 -69.596,-33.274 -69.596,-38.608 -68.072,-40.132 -68.072,-55.245 -66.675,-56.642 -60.833,-50.8 -60.071,-50.8 -60.071,-44.577 -62.611,-42.037 -61.214,-40.64 -61.214,-30.607 -58.928,-30.607 -53.34,-25.019 -43.053,-25.019 -42.418,-25.654 -41.529,-24.765 -34.671,-24.765 -30.607,-28.829 -30.607,-32.639 -34.036,-36.068 -40.259,-36.068 -41.021,-35.306 -41.351,-35.636 -42.711,-35.636 -42.711,-36.361 -43.307,-36.957 -42.672,-37.592 -38.481,-37.592 -35.56,-40.513 -33.528,-40.513 -30.226,-43.815 -30.226,-44.196 -31.115,-44.196 -32.639,-45.72 -36.449,-45.72 -41.529,-50.8 -41.529,-58.801 -38.227,-62.103 -36.83,-62.103
V_NEG on PWR "V_NEG_L03_P002" (solid, pour order 2): -93.472,-68.072 -92.456,-68.072 -79.756,-80.772 -71.501,-72.517 -71.501,-69.85 -51.308,-69.85 -45.212,-63.754 -45.212,-50.165 -46.101,-49.276 -44.577,-47.752 -39.37,-47.752 -39.37,-47.117 -38.1,-45.847 -36.195,-45.847 -36.195,-45.339 -35.052,-44.196 -35.179,-44.069 -35.179,-42.418 -36.068,-42.418 -40.386,-38.1 -43.053,-38.1 -44.704,-36.449 -44.831,-36.449 -44.831,-35.941 -43.307,-34.417 -43.18,-34.544 -36.576,-34.544 -34.544,-32.512 -34.798,-32.258 -34.798,-29.337 -49.276,-29.337 -49.657,-28.956 -56.261,-35.56 -56.261,-44.831 -54.356,-46.736 -55.245,-47.625 -55.245,-61.087 -59.182,-65.024 -59.944,-64.262 -67.437,-64.262 -67.437,-61.468 -71.501,-57.404 -71.501,-44.577 -74.041,-42.037 -74.041,-28.321 -72.771,-27.051 -73.279,-26.543 -73.279,-20.32 -73.025,-20.32 -70.485,-17.78 -70.485,-10.287 -66.802,-6.604 -25.908,-6.604 -20.447,-12.065 -15.748,-12.065 -11.811,-16.002 -6.731,-16.002 -6.731,-27.305 -5.207,-28.829 -7.239,-30.861 -7.239,-35.941 -8.636,-35.941 -13.589,-40.894 -13.589,-45.974 -2.54,-45.974 -2.413,-46.101 -0.762,-44.45 -0.762,-0.762 -61.849,-0.762 -62.103,-1.016 -93.853,-1.016 -96.774,-3.937 -96.774,-24.765

## Silkscreen, mask and mechanical layers (free items; w line width, h text height)
Top Overlay:
  text "GROUP 26" at -20.131,-64.516 h2
  text "ENTC @ UOM" at -24.13,-67.818 h2
Mechanical 1:
  lines w0.254: -98.806,-90.043 -98.806,0 -0.127,0 -0.127,-90.297 -98.552,-90.297 -98.806,-90.043

## Text inside footprints (layer, text, board x,y; h text height)
C21: Top Overlay "+" at -37.469,-78.257 h1.5 r180
C22: Top Overlay "+" at -3.679,-79.731 h1.5
C23: Top Overlay "+" at -59.03,-87.126 h1.5 r270
C24: Top Overlay "+" at -67.687,-79.731 h1.5